# Altium PCB ECE315.PcbDoc (part 1 of 2)
Units mm, origin at the board's own origin, x right, y up, seen from the top; angles counter-clockwise.
Board outline 100.25 x 100.25 mm, 2 copper layers (Top Layer, Bottom Layer); 67 components, 52 nets, 224 pads, 194 vias.
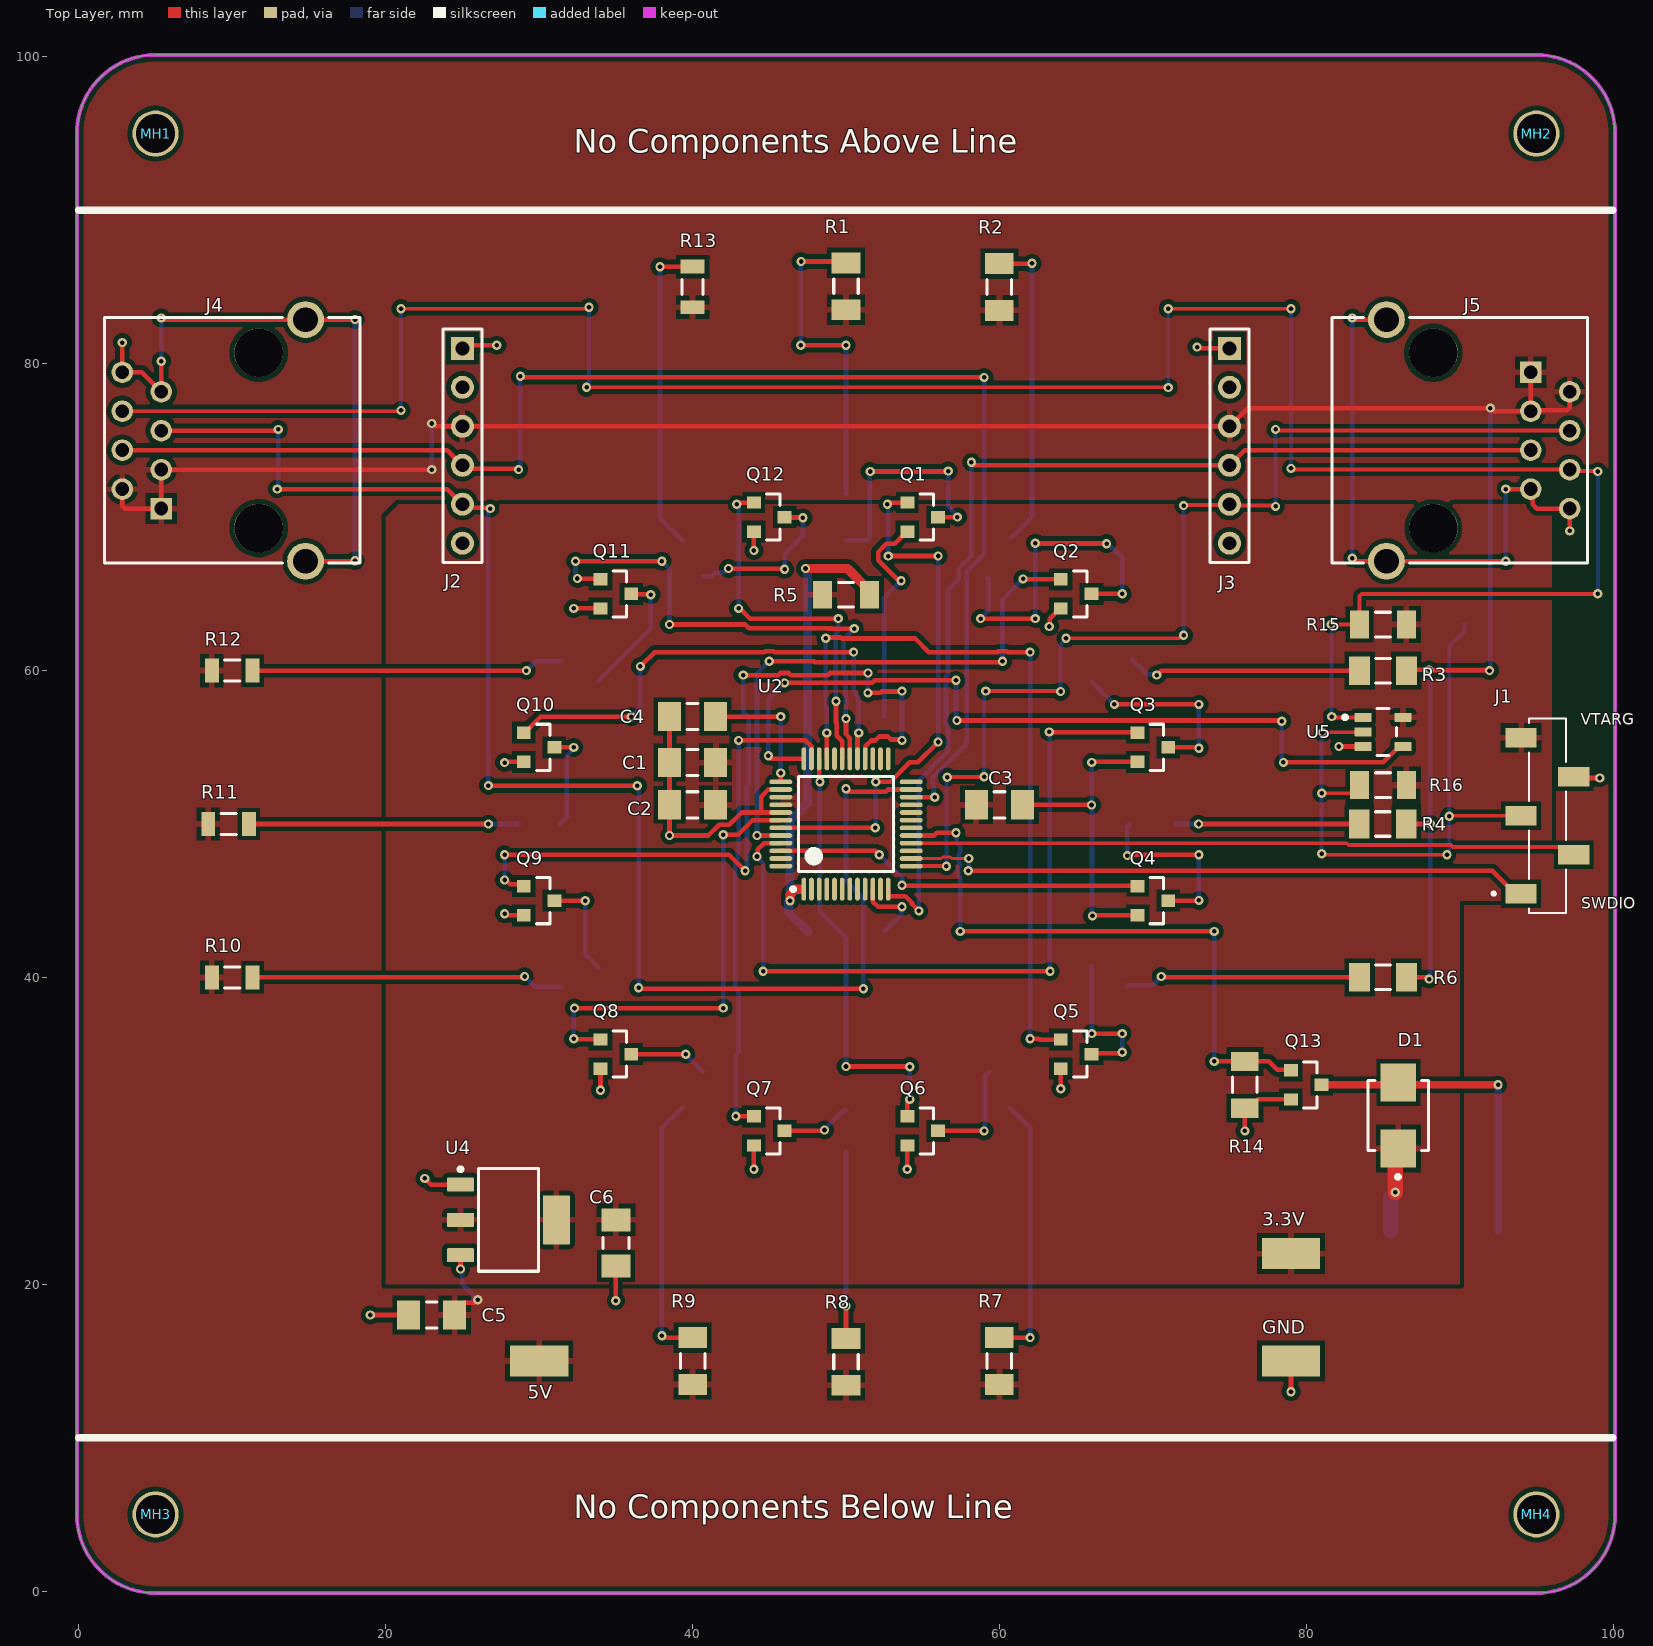
[diagram p0: Top Layer view]
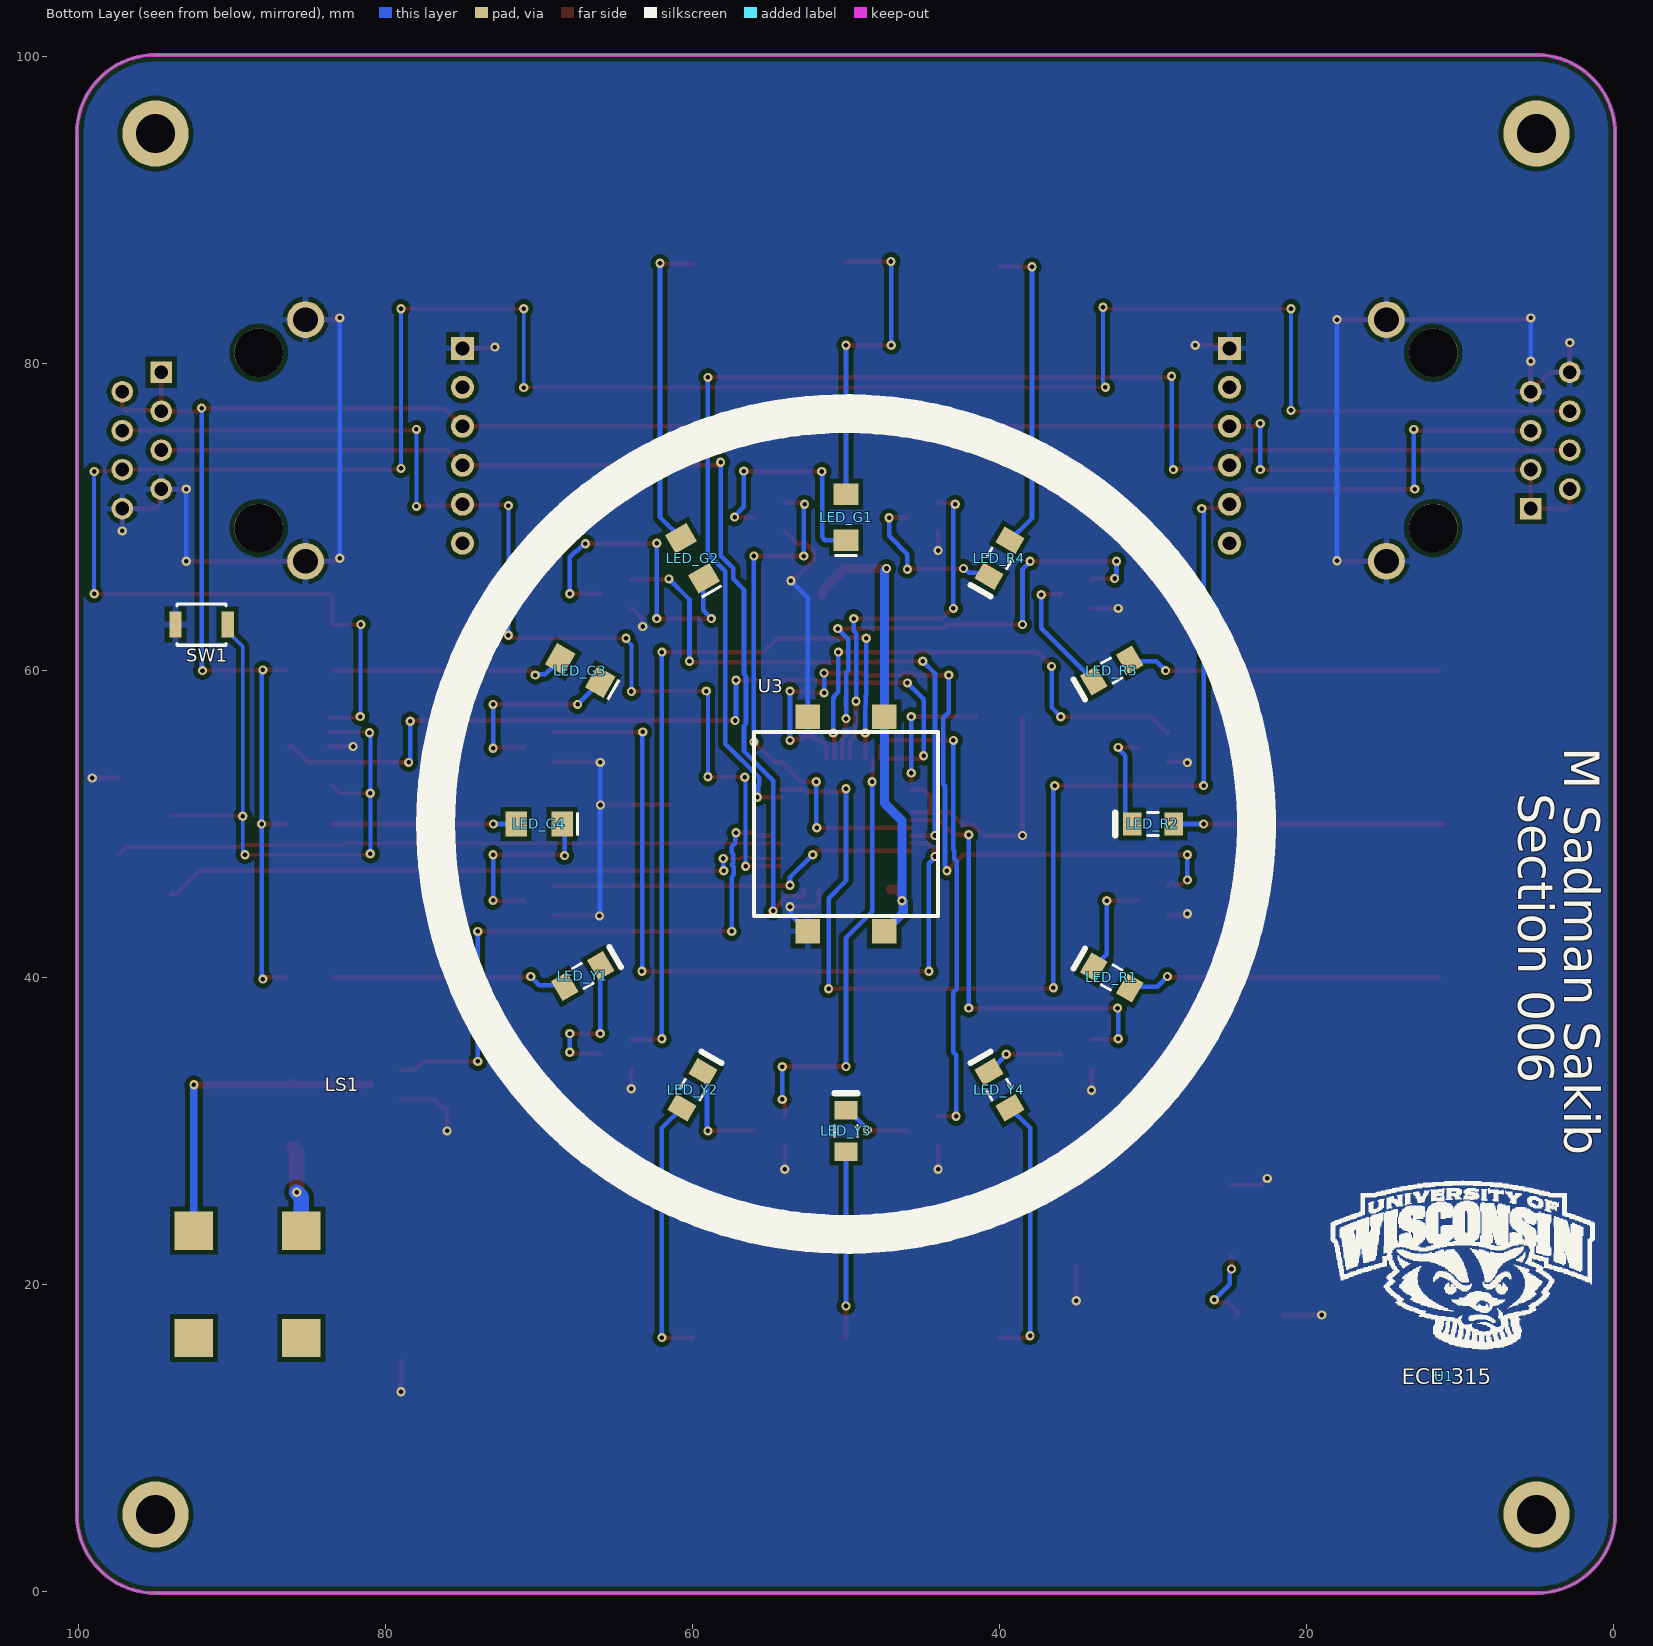
[diagram p1: Bottom Layer view, seen from below]
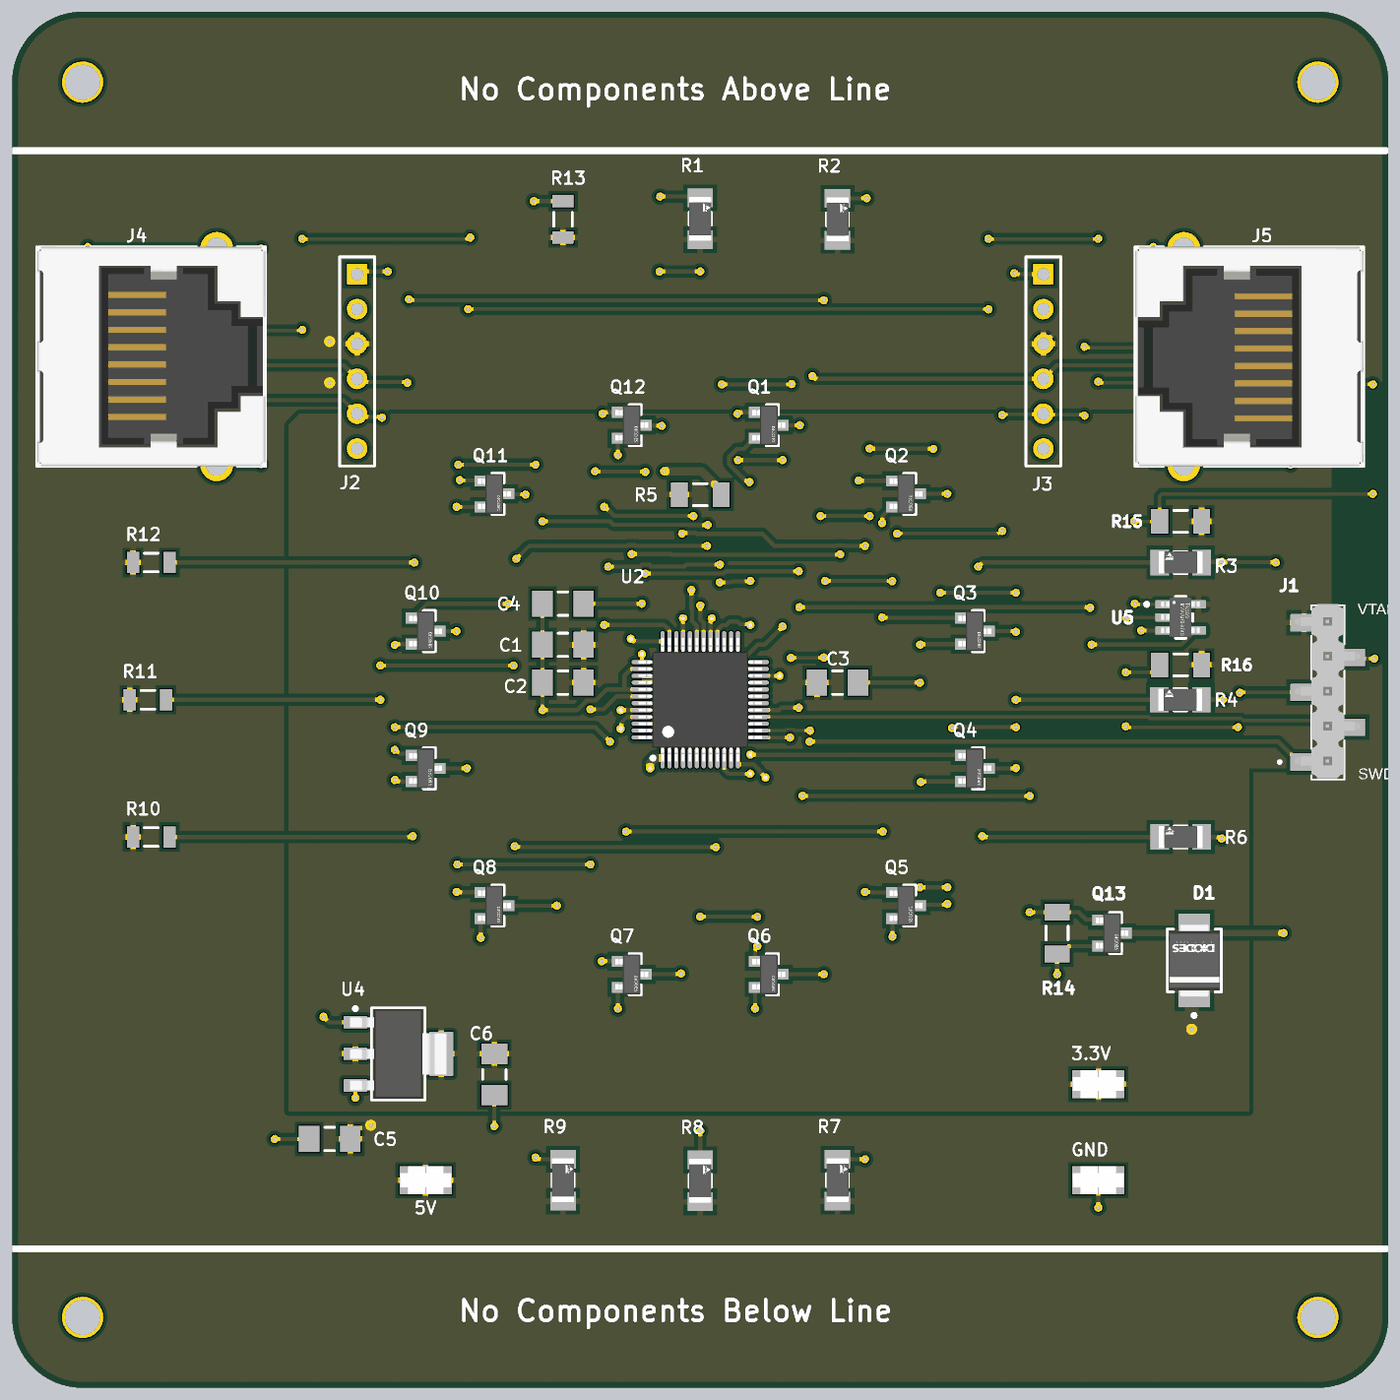
[diagram p2: 3D render of the assembled board from above, using the file's embedded part models]

## Layer stack, top to bottom
Top Solder: solder mask 0.0102, Solder Resist, Dk 3.5
Top Layer: signal copper 0.0356
Dielectric1: dielectric 0.32, FR-4, Dk 4.8
Bottom Layer: signal copper 0.0356
Bottom Solder: solder mask 0.0102, Solder Resist, Dk 3.5

## Board outline
-0.127,4.999 ccw(c5,5) 5,-0.127 95,-0.127 ccw(c95,5) 100.127,5 100.127,95 ccw(c95,95) 95.001,100.127 95,100.127 5,100.127 4.999,100.127 ccw(c5,95) -0.119,95.296 -0.127,95.25

## Design rules (kind name [scope] priority, off if disabled: settings)
Clearance Polygon_Clearance [All vs InPolygon] p1: gap=0.3 ignorepadtopadclearanceinfootprint=FALSE
Clearance [All] p2: gap=0.2 ignorepadtopadclearanceinfootprint=TRUE
ComponentClearance [InComponent('U3')] p1: gap=0 collisioncheckmode=3 verticalgap=0.254 showdistances=FALSE
Height [All] p1: minheight=0 maxheight=75 prefheight=12.7
HoleSize [All] p1: absolutevalues=TRUE maxlimit=6.35 minlimit=0.3 maxpercent=80.000 minpercent=20.000
MinimumAnnularRing [All] p1: minimumring=0.15
MinimumSolderMaskSliver [All] p1: minsoldermaskwidth=0.22
NetAntennae NetAntennae_5.0V [InNet('5.0V')] p1: netantennaetolerance=0
NetAntennae NetAntennae_3.3V [InNet('3.3V')] p2: netantennaetolerance=0
PlaneClearance [All] p1: clearance=0.3
PlaneConnect [All] p1: planeconnectstyle=Relief reliefexpansion=0.3 reliefentries=4 reliefconductorwidth=0.3 reliefairgap=0.3
PolygonConnect ViaConnect [All vs IsVia] p1: connectstyle=Direct reliefconductorwidth=0.381 reliefentries=4 polygonreliefangle="90 Angle" airgapwidth=0.254
PolygonConnect [All] p2: connectstyle=Relief reliefconductorwidth=0.4 reliefentries=4 polygonreliefangle="90 Angle" airgapwidth=0.3
RoutingVias [All] p1: holewidth=0.3 width=0.6 viastyle="Through Hole" minholewidth=0.3 minwidth=0.6 maxholewidth=5 maxwidth=10
SilkToSilkClearance [All] p1: silktosilkclearance=0
SilkToSolderMaskClearance [IsPad] p1: minsilkscreentomaskgap=0 clearancetoexposedcopper=TRUE
SolderMaskExpansion [All] p1: expansion=0.102 istentingtop=FALSE
UnConnectedPin [All] p1:
Width [All] p1: maxlimit=10 minlimit=0.2 preferedwidth=0.6
21 further rules are at their usual default settings.

## Components (designator, comment, footprint, x,y, rotation, side; value= is the part's Value field where it differs from the comment)
3.3V "5019" KSTN-5019_V 79,22 r180 top (schematic designator TP2)
5V "5019" KSTN-5019_V 30,15 r180 top (schematic designator TP1)
C1 "C1206C105K3RACTU" CAPC3216X180X50ML20T25 40,54 r0 top
C2 "C1206C105K3RACTU" CAPC3216X180X50ML20T25 40,51.25 r0 top
C3 "C1206C105K3RACTU" CAPC3216X180X50ML20T25 60,51.25 r180 top
C4 "C1206C105K3RACTU" CAPC3216X180X50ML20T25 40,57 r0 top
C5 "C1206C105K3RACTU" CAPC3216X180X50ML20T25 23,18 r0 top
C6 "C1206C105K3RACTU" CAPC3216X180X50ML20T25 35,22.7 r90 top
D1 "B340LB-13-F" FP-SMB-MFG 86,31 r90 top value=180pF
GND "5019" KSTN-5019_V 79,15 r180 top (schematic designator TP3)
J1 "10129380-905002BLF" AMPHENOL_10129380-905002BLF 95.715,50.54 r90 top
J2 "" HDR1X6 25,81 r270 top locked
J3 "" HDR1X6 75,81 r270 top locked
J4 "615008138221" 615008138221 10,75 r90 top locked
J5 "615008138221" 615008138221 90,75 r270 top locked
LED_G1 "150120GS75000" WL-SMCW_1206_150120xx75000 50,70 r90 bottom locked
LED_G2 "150120GS75000" WL-SMCW_1206_150120xx75000 60,67.321 r60 bottom locked
LED_G3 "150120GS75000" WL-SMCW_1206_150120xx75000 67.321,60 r30 bottom locked
LED_G4 "150120GS75000" WL-SMCW_1206_150120xx75000 70,50 r0 bottom locked
LED_R1 "SML-LX1206IC-TR" LUMX-SML-LX1206IC_V 32.679,40 r30 bottom locked
LED_R2 "SML-LX1206IC-TR" LUMX-SML-LX1206IC_V 30,50 r0 bottom locked
LED_R3 "SML-LX1206IC-TR" LUMX-SML-LX1206IC_V 32.679,60 r330 bottom locked
LED_R4 "SML-LX1206IC-TR" LUMX-SML-LX1206IC_V 40,67.321 r300 bottom locked
LED_Y1 "SML-LX1206YC-TR" LUMX-SML-LX1206YC-TR_V 67.158,40.094 r150 bottom locked
LED_Y2 "SML-LX1206YC-TR" LUMX-SML-LX1206YC-TR_V 60,32.679 r120 bottom locked
LED_Y3 "SML-LX1206YC-TR" LUMX-SML-LX1206YC-TR_V 50,30 r90 bottom locked
LED_Y4 "SML-LX1206YC-TR" LUMX-SML-LX1206YC-TR_V 40,32.679 r60 bottom locked
LS1 "CMT-8540S-SMT" CUI_CMT-8540S-SMT 89,20 r90 bottom
MH1 "MHOLE_2_55MM" MHOLE_2_55MM#1 10,90 r0 top locked
MH2 "MHOLE_2_55MM" MHOLE_2_55MM#2 90,90 r0 top locked
MH3 "MHOLE_2_55MM" MHOLE_2_55MM#3 10,10 r0 top locked
MH4 "MHOLE_2_55MM" MHOLE_2_55MM#4 90,10 r0 top locked
Q1 "2N7002-7-F" FP-SOT23-MFG 55,70 r0 top
Q2 "2N7002-7-F" FP-SOT23-MFG 65,65 r0 top
Q3 "2N7002-7-F" FP-SOT23-MFG 70,55 r0 top
Q4 "2N7002-7-F" FP-SOT23-MFG 70,45 r0 top
Q5 "2N7002-7-F" FP-SOT23-MFG 65,35 r0 top
Q6 "2N7002-7-F" FP-SOT23-MFG 55,30 r0 top
Q7 "2N7002-7-F" FP-SOT23-MFG 45,30 r0 top
Q8 "2N7002-7-F" FP-SOT23-MFG 35,35 r0 top
Q9 "2N7002-7-F" FP-SOT23-MFG 30,45 r0 top
Q10 "2N7002-7-F" FP-SOT23-MFG 30,55 r0 top
Q11 "2N7002-7-F" FP-SOT23-MFG 35,65 r0 top
Q12 "2N7002-7-F" FP-SOT23-MFG 45,70 r0 top
Q13 "2N7002-7-F" FP-SOT23-MFG 80,33 r0 top
R1 "CRCW1206330RFKEA" FP-CRCW1206-e3-IPC_A 50,85.045 r90 top
R2 "CRCW1206330RFKEA" FP-CRCW1206-e3-IPC_A 60,85 r90 top
R3 "CRCW1206330RFKEA" FP-CRCW1206-e3-IPC_A 85,60 r180 top
R4 "CRCW1206330RFKEA" FP-CRCW1206-e3-IPC_A 84.982,50 r180 top
R5 "RC1206FR-0710KL" RESC3116X65X40ML10T20 50,64.944 r180 top
R6 "CRCW1206330RFKEA" FP-CRCW1206-e3-IPC_A 85,40 r180 top
R7 "CRCW1206330RFKEA" FP-CRCW1206-e3-IPC_A 60,15 r90 top
R8 "CRCW1206330RFKEA" FP-CRCW1206-e3-IPC_A 50,14.95 r90 top
R9 "CRCW1206330RFKEA" FP-CRCW1206-e3-IPC_A 40,15 r90 top
R10 "560Ω" RESC3216X70X50LL05T20 10,40 r0 top
R11 "560Ω" RESC3216X70X50LL05T20 9.759,50 r0 top
R12 "560Ω" RESC3216X70X50LL05T20 10,60 r0 top
R13 "560Ω" RESC3216X70X50LL05T20 40,85 r90 top
R14 "RC1206FR-0710KL" RESC3116X65X40ML10T20 76,33 r90 top
R15 "RC1206FR-0710KL" RESC3116X65X40ML10T20 85,63 r0 top
R16 "RC1206FR-0710KL" RESC3116X65X40ML10T20 85,52.54 r0 top
SW1 "B3U-1000P" FP-B3U-1000P-MFG 92,63 r180 bottom
U1 "Bucky" WalkingBucky 11,14 r180 bottom
U2 "CY8C4045AZI-S413" TQFP48_7X7 50,50 r90 top
U3 "TL3300DF160Q" TL3300DF160Q 50,50 r90 bottom
U4 "TLV1117LV33DCYR" DCY0004A_N 28,24.2 r0 top
U5 "SN74AHC1G08DBVR" FP-DBV0005A-MFG 85,56 r0 top

## Footprints (in the part's own frame and the unit in brackets; to place one, negate y for a bottom-side part, rotate by r counter-clockwise, add the part's x,y. Pads: shape width x height; smd on the part's side, far side on the other; paste and mask are expansions set on the pad)
615008138221 [mm] "Modular Jack Vertical Shielded 8P8C Front Post"
  rect 1.4x1.4 hole 0.9: 1(-4.445,4.625)
  round 1.4 hole 0.9: 2(-3.175,7.165) 3(-1.905,4.625) 4(-0.635,7.165) 5(0.635,4.625) 6(1.905,7.165) 7(3.175,4.625) 8(4.445,7.165)
  round 3.17 hole 3.17 unplated: MH1(-5.715,-1.725) MH2(5.715,-1.725)
  round 2.4 hole 1.6: S1(-7.875,-4.775) S2(7.875,-4.775)
  silkscreen extent -8,-8.33 8,8.32, body extent -8,-8.32 8,8.33, height 16.62
AMPHENOL_10129380-905002BLF [mm]
  rect 1.27x2.03 smd mask+0.05: 1(-5.08,1.715) 2(-2.54,-1.715) 3(0,1.715) 4(2.54,-1.715) 5(5.08,1.715)
  silkscreen extent -6.35,-1.22 6.35,3.6, body extent -6.27,-2.38 6.43,2.41, height 12.07
CAPC3216X180X50ML20T25 [mm] "Chip Capacitor, 2-Leads, Body 3.40x1.80mm, IPC Low Density"
  rect 1.5x1.9 smd: 1(-1.5,0) 2(1.5,0)
  silkscreen extent -0.35,-0.85 0.35,0.85, body extent -1.7,-0.9 1.7,0.9, height 1.8
CUI_CMT-8540S-SMT [mm]
  rect 2.5x2.5 smd: M1(-3.5,-3.5) M2(-3.5,3.5) N(3.5,3.5) P(3.5,-3.5)
DCY0004A_N [mm] "SOT223, 4-Leads, Body 6.7x3.7mm, Pitch 2.3mm, IPC Medium Density"
  rrect11% 1.75x0.9 smd: 1(-3.125,2.3) 2(-3.125,0) 3(-3.125,-2.3)
  rrect6% 1.75x3.2 smd: 4(3.125,0)
  silkscreen extent -3.25,-3.35 1.95,3.42, body extent -3.5,-3.25 3.5,3.25, height 1.62
FP-B3U-1000P-MFG [mm]
  rect 0.8x1.7 smd paste+0 mask+0: 1(-1.7,0) 2(1.7,0)
  silkscreen extent -1.6,-1.35 1.6,1.35, body extent -2,-1.26 2,1.24, height 1.6
FP-CRCW1206-e3-IPC_A [mm]
  rect 1.356x1.858 smd paste+0 mask+0: 1(-1.526,0) 2(1.526,0)
  silkscreen extent -0.47,-0.8 0.47,0.8, body extent -2.7,-1.43 2.7,1.43, height 0.25
FP-DBV0005A-MFG [mm]
  rrect17% 1.1x0.6 smd paste+0 mask+0: 1(-1.3,0.95) 2(-1.3,0) 3(-1.3,-0.95) 4(1.3,-0.95) 5(1.3,0.95)
  silkscreen extent -2.6,-1.53 0.87,1.52, body extent -1.95,-1.78 1.95,1.78, height 0.25
FP-SMB-MFG [mm]
  rect 2.5x2.3 smd paste+0 mask+0: 1(-2.15,0) 2(2.15,0)
  silkscreen extent -4.12,-1.97 2.28,1.97, body extent -3.5,-2.07 3.5,2.07, height 0.25
FP-SOT23-MFG [mm]
  rect 0.9x0.8 smd paste+0 mask+0: 1(-1,0.95) 2(-1,-0.95) 3(1,0)
  silkscreen extent -0.18,-1.5 0.7,1.5, body extent -1.55,-1.6 1.55,1.6, height 0.25
HDR1X6 [mm] "Connector; Header; 6 Position"
  rect 1.5x1.5 hole 0.9: 1(0,0)
  round 1.5 hole 0.9: 2(2.54,0) 3(5.08,0) 4(7.62,0) 5(10.16,0) 6(12.7,0)
  silkscreen extent -1.27,-1.27 13.97,1.27
KSTN-5019_V [mm] "Test Point, 1-Leads, Body 3.81x2.03mm"
  rect 3.8x2.03 smd: 1(0,0)
  body extent -1.9,-1.01 1.9,1.02, height 2.29
LUMX-SML-LX1206IC_V [mm] "SMD, 2-Leads, Body 3.2x1.5mm"
  rect 1.2x1.5 smd: 1(-1.35,0) 2(1.35,0)
  silkscreen extent -0.35,-0.75 2.45,0.75, body extent -1.6,-0.8 1.6,0.8, height 1.1
LUMX-SML-LX1206YC-TR_V [mm] "SMD, 2-Leads, Body 3.2x1.5mm"
  rect 1.2x1.5 smd: 1(-1.35,0) 2(1.35,0)
  silkscreen extent -0.35,-0.75 2.45,0.75, body extent -1.6,-0.75 1.6,0.75, height 1.25
MHOLE_2_55MM#1 [mm]
  round 3 / inner round 4.572 / far side round 4.318 hole 2.55: 1(-5,5)
MHOLE_2_55MM#2 [mm]
  round 3 / inner round 4.572 / far side round 4.318 hole 2.55: 1(5,5)
MHOLE_2_55MM#3 [mm]
  round 3 / inner round 4.572 / far side round 4.318 hole 2.55: 1(-5,-5)
MHOLE_2_55MM#4 [mm]
  round 3 / inner round 4.572 / far side round 4.318 hole 2.55: 1(5,-5)
RESC3116X65X40ML10T20 [mm] "Chip Resistor, 2-Leads, Body 3.10x1.60mm, IPC Low Density"
  rect 1.25x1.8 smd: 1(-1.525,0) 2(1.525,0)
  silkscreen extent -0.5,-0.8 0.5,0.8, body extent -1.6,-0.85 1.6,0.85, height 0.65
RESC3216X70X50LL05T20 [mm] "Chip Resistor, 2-Leads, Body 3.20x1.60mm, IPC High Density"
  rect 0.9x1.55 smd: 1(-1.325,0) 2(1.325,0)
  silkscreen extent -0.5,-0.67 0.5,0.67, body extent -1.63,-0.82 1.62,0.82, height 0.7
TL3300DF160Q [mm] "SWITCH TACTILE SPST-NO 0.05A 12V"
  rect 1.6x1.6 smd: 1(-7,2.5) 2(7,2.5) 3(-7,-2.5) 4(7,-2.5)
  silkscreen extent -6,-6 6,6, body extent -7.51,-6.03 7.49,5.97, height 4.3
TQFP48_7X7 [mm] "TSQFP, 48-Leads, Body 7.00x7.00mm, Pitch 0.50mm, IPC Medium Density"
  oval 1.5x0.3 smd: 1(-4.25,2.75) 2(-4.25,2.25) 3(-4.25,1.75) 4(-4.25,1.25) 5(-4.25,0.75) 6(-4.25,0.25) 7(-4.25,-0.25) 8(-4.25,-0.75) 9(-4.25,-1.25) 10(-4.25,-1.75) 11(-4.25,-2.25) 12(-4.25,-2.75) 25(4.25,-2.75) 26(4.25,-2.25) 27(4.25,-1.75) 28(4.25,-1.25) 29(4.25,-0.75) 30(4.25,-0.25) 31(4.25,0.25) 32(4.25,0.75) 33(4.25,1.25) 34(4.25,1.75) 35(4.25,2.25) 36(4.25,2.75)
  oval 0.3x1.5 smd: 13(-2.75,-4.25) 14(-2.25,-4.25) 15(-1.75,-4.25) 16(-1.25,-4.25) 17(-0.75,-4.25) 18(-0.25,-4.25) 19(0.25,-4.25) 20(0.75,-4.25) 21(1.25,-4.25) 22(1.75,-4.25) 23(2.25,-4.25) 24(2.75,-4.25) 37(2.75,4.25) 38(2.25,4.25) 39(1.75,4.25) 40(1.25,4.25) 41(0.75,4.25) 42(0.25,4.25) 43(-0.25,4.25) 44(-0.75,4.25) 45(-1.25,4.25) 46(-1.75,4.25) 47(-2.25,4.25) 48(-2.75,4.25)
  silkscreen extent -4.37,-3.1 3.1,3.57, body extent -4.5,-4.5 4.5,4.5, height 1.4
WalkingBucky [mm]
  silkscreen extent -7.42,1.75 9.8,12.73
WL-SMCW_1206_150120xx75000 [mm] "SMD Mono-color Chip LED, body 3.2x1.6mm"
  rect 1.4x1.6 smd: 1(-1.5,0) 2(1.5,0)
  silkscreen extent -2.6,-0.75 -2.4,0.75, body extent -1.6,-0.8 1.6,0.8, height 0.68

## Part data
3.3V 5V GND: library part CMP-1672-00008-1, "Test Point, 1 Position SMD, RoHS, Tape and Reel", Package Quantity=1000, ComponentLink1Description="Manufacturer URL", ComponentLink1URL=http://www.keyelco.com/, ComponentLink2Description=Datasheet, ComponentLink2URL=http://www.keyelco.com/product-pdf.cfm?p=1357, Contact Plating=Silver, DatasheetVersion=03/2014, Mount="Surface Mount", Mounting Technology="Surface Mount", PackageDescription="1-Pin Surface Mount Device, Body 3.81 x 2.03 mm", PackageReference=5019, Packaging="Tape and Reel", Pins=1, RoHSCompliant=True
C1 C2 C3 C4 C5 C6: library part CMP-2000-04991-1, "Chip Capacitor, 1 uF, +/- 10%, 25 V, -55 to 125 degC, 1206 (3216 Metric), RoHS, Tape and Reel", Capacitance=1uF, Capacitance - nF=1000nF, Case Code - in=1206, Case Code - mm=3216, Case Height=1.6mm, Case Length=3.2mm, Dielectric=X7R, Manufacturer=Kemet, Maximum Operating Temperature=+125C, Minimum Operating Temperature=-55C, Operating Temperature Range=-55Cto+125C, Package / Case=1206(3216metric), Package Description="2-Pin Surface Mount Device, Body 3.2 x 1.6 mm", Temperature Coefficient / Code=+/-15%, Tolerance=10%, Voltage Rating=25V, Brand=Kemet, Case Width=1.6mm, Class=Class1, Datasheet URL=https://ciiva.com/datasheet-click-18194173?src=ciiva&sig=6daff8c4, Datasheet Version=Jul-14, Dimensions=1.6mmWx3.2mmLx1.6mmH, Factory Pack Quantity=2000, Manufacturer URL=http://www.kemet.com/, Package Reference=1206, Packaging=Reel, Product=GeneralTypeMLCCs, Product Category=MultilayerCeramicCapacitorsMLCC-SMD/SMT, RoHS=Details, Series=C1206C, Termination Style=SMD/SMT, Type=SMDMLCCX7R6.3-250VDCCommericalGrade, Voltage Rating DC=25V
D1: library part CMP-12790-000022-1, "DIODE SCHOTTKY 40V 3A SMB", Average Rectified Current=3A, Capacitance=180pF, Case/Package=SMB, Forward Voltage=450mV, Manufacturer="Diodes Inc.", Max Forward Surge Current (Ifsm)=70A, Max Junction Temp=+150°C, Max Operating Temperature=125°C, Max Repetitive Reverse Voltage=40V, Max Reverse Current=2mA, Min Operating Temperature=-55°C, Package Quantity=3000, Supplier Part Number 1=B340LB-FDICT-ND, Temperature="-55°C to +150°C", Automotive=No, Category=Diode, ComponentLink1Description=https://datasheet.ciiva.com/4715/ds30240-71143-4715794.pdf?src-supplier=Mouser, ComponentLink1URL=https://datasheet.ciiva.com/4715/ds30240-71143-4715794.pdf?src-supplier=Mouser, ComponentLink2Description=Datasheet, ComponentLink2URL=https://www.diodes.com/assets/Datasheets/ds30240.pdf, ComponentLink3Description=https://datasheet.ciiva.com/26949/getdatasheetpartid-146318-26949355.pdf?src-supplier=Verical, ComponentLink3URL=https://datasheet.ciiva.com/26949/getdatasheetpartid-146318-26949355.pdf?src-supplier=Verical, ComponentLink4Description=https://datasheet.ciiva.com/1177/ds30240-1177479.pdf?src-supplier=Element14, ComponentLink4URL=https://datasheet.ciiva.com/1177/ds30240-1177479.pdf?src-supplier=Element14, ComponentLink5Description=https://datasheet.ciiva.com/16380/ds30240-16380877.pdf?src-supplier=Future+Electronics, ComponentLink5URL=https://datasheet.ciiva.com/16380/ds30240-16380877.pdf?src-supplier=Future+Electronics, ComponentLink6Description=https://datasheet.ciiva.com/8303/ds30240-8303077.pdf?src-supplier=Avnet, ComponentLink6URL=https://datasheet.ciiva.com/8303/ds30240-8303077.pdf?src-supplier=Avnet, ComponentLink7Description=https://datasheet.ciiva.com/914/ds30240-914107.pdf?src-supplier=Digi-Key, ComponentLink7URL=https://datasheet.ciiva.com/914/ds30240-914107.pdf?src-supplier=Digi-Key, ComponentLink8Description=https://datasheet.ciiva.com/914/ds30240-914108.pdf?src-supplier=Digi-Key, ComponentLink8URL=https://datasheet.ciiva.com/914/ds30240-914108.pdf?src-supplier=Digi-Key, ComponentLink9Description=https://datasheet.ciiva.com/914/ds30240-914106.pdf?src-supplier=Digi-Key, ComponentLink9URL=https://datasheet.ciiva.com/914/ds30240-914106.pdf?src-supplier=Digi-Key, Current=3A, Current Rating=3A, Device Class L1="Discrete Semiconductors", Device Class L2=Diodes, Device Class L3="Schottky Diodes", Digikey Description="DIODE SCHOTTKY 40V 3A SMB", Element Configuration=Single, Footprint Url=https://www.diodes.com/assets/Package-Files/SMB.pdf, Forward Current=3A, Height=2.5mm, Lead Free=Yes, Length=4.57mm, Manufacturer Part Number=B340LB-13-F, Max Repetitive Reverse Voltage (Vrrm)=40V, Max Reverse Voltage (DC)=40V, Max Surge Forward Current=70A, Mount="Surface Mount", Mouser Description="Schottky Diodes & Rectifiers 40V 3A", Number of Pins=2, Octopart=https://octopart.com/b340lb-13-f-diodes+inc.-325823, Output Current=3A, Package=SMB, Packaging="Tape and Reel", Peak Non-Repetitive Surge Current=70A, Peak Reverse Current=2mA, Polarity=Standard, Pricing 1="1=0.43000, 10=0.36500, 100=0.27250, 500=0.21414, 1000=0.16547 (USD)", Radiation Hardening=No, Reach SVHC Compliant=Yes, Reverse Voltage=40V, RoHS=TRUE, RoHS Compliant=Yes, Series=-, Standoff Height=0.05mm, Stock 1=168517, Supplier 1=Digi-Key, Supplier 2=Newark, Supplier Part Number 2=12T1468, Temperature Range High=+150°C, Temperature Range Low=-55°C, Termination=SMD/SMT, Voltage=40V, Voltage Rating (DC)=40V, Weight=0.00328oz, Width=3.94mm
J1: "Conn Unshrouded Header HDR 5 POS 2.54mm Solder ST SMD Poly Bag", Manufacturer 1=ICC, Package=None, Supplier Part Number 1=10129380-905002BLF-ND, Availability="In Stock", Check_prices=https://www.snapeda.com/parts/10129380-905002BLF/Amphenol/view-part/?ref=eda, Manufacturer Part Number 1=10129380-905002BLF, MF="AMPHENOL ICC / FCI", MP=10129380-905002BLF, Price=None, Purchase-URL=https://pricing.snapeda.com/search/part/10129380-905002BLF/?ref=eda, RoHS=No, SnapEDA_Link=https://www.snapeda.com/parts/10129380-905002BLF/Amphenol/view-part/?ref=snap, Supplier 1=Digi-Key
J2 J3: library part CONN_HEADER_MALE_1x6, "Female, 6C, Rt Angle, .100\"CC; 3.15mm Tail, No Mounting; PBT, Phos. Bronze, 105 C", Color=Black, Flammability Rating="UL94 V-0", Manufacturer 1=Sullins, Manufacturer Part Number 1=PPPC061LGBN-RC, Max Operating Temperature=105°C, Min Operating Temperature=-40°C, Package Quantity=1000, Supplier Part Number 1=S5481-ND, Voltage Rating=250V, Category=Connectors, ComponentLink1Description=https://media.digikey.com/pdf/Data%20Sheets/Sullins%20PDFs/Female_Headers.100_DS.pdf?src-supplier=Digi-Key, ComponentLink1URL=https://media.digikey.com/pdf/Data%20Sheets/Sullins%20PDFs/Female_Headers.100_DS.pdf?src-supplier=Digi-Key, ComponentLink2Description=http://www.sullinscorp.com/catalogs/78_Page80-81_HEADER_.100_2.54mm_FEMALE.pdf?src-supplier=Future+Electronics, ComponentLink2URL=http://www.sullinscorp.com/catalogs/78_Page80-81_HEADER_.100_2.54mm_FEMALE.pdf?src-supplier=Future+Electronics, Connector Type=Header, Contact Finish - Mating=GOLD, Contact Material=Bronze, Contact Plating=Gold, Contact Shape=Square, Contact Type="Female Socket", Fastening Type=Pull, Height=2.4mm, Housing Color=Black, Housing Material=Plastic, Insulation Color=Black, Insulation Material=Polyester, Lead Free="Lead Free", Length=15.7mm, Mount="Through Hole", Number of Positions=6, Number of Rows=1, Packaging=Bulk, Pitch=0.1inch, Pricing 1="1=0.66, 10=0.56, 80=0.50288, 440=0.41148, 1000=0.36576, 5000=0.3302 (USD)", RoHS=Yes, RoHS Compliant=Yes, Series=-, Stock 1=12284, Supplier 1=Digi-Key, Termination=Solder, Width=8.5mm
J4 J5: library part CMP-1502-01731-1, "Modular Jack WR-MJ, Front Post, Shielded, Vertical Entry, THT, 8P8C", Contact Resistance=20mOhm, Manufacturer="Wurth Elektronik", Operating Temperature=-40to85degC, Rated Current=1.5A, Withstanding Voltage=1000VAC, Working Voltage=120VAC, Compliance=Leadfree/RoHS, Datasheet URL=https://katalog.we-online.com/em/datasheet/615008138221.pdf, Entrance=Vertical, Manufacturer URL=http://www.we-online.de, Mounting Technology=THT, Package Reference=615008138221, Packaging=Tray, Part Number=615008138221, Pin Number=8P8C, Port=1x1, Publisher=WurthElektronik
LED_G1 LED_G2 LED_G3 LED_G4: library part CMP-1426-00014-3, Case Code (Imperial)=1206, Case Code (Metric)=3216, Color=Green, Forward Current=100mA, Forward Voltage=3.2V, Lens Color=Colorless, Manufacturer="Wurth Electronics", Max Junction Temperature (Tj)=95°C, Max Operating Temperature=85°C, Max Reverse Voltage (DC)=5V, Min Operating Temperature=-40°C, Package Quantity=1, Power Dissipation=105mW, Supplier Part Number=732-4990-1-ND, Test Current=20mA, Case/Package=1206, Category=LEDs, ComponentLink1Description=https://datasheet.ciiva.com/22656/150120gs75000-22656979.pdf?src-supplier=Element14, ComponentLink1URL=https://datasheet.ciiva.com/22656/150120gs75000-22656979.pdf?src-supplier=Element14, ComponentLink2Description=https://datasheet.ciiva.com/29279/759441-da-01-en-chipled-1206-w-kl-gruen-150120gs75000-29279042.pdf?src-supplier=Conrad, ComponentLink2URL=https://datasheet.ciiva.com/29279/759441-da-01-en-chipled-1206-w-kl-gruen-150120gs75000-29279042.pdf?src-supplier=Conrad, ComponentLink3Description=https://datasheet.ciiva.com/29561/150120gs75000-29561883.pdf?src-supplier=Digi-Key, ComponentLink3URL=https://datasheet.ciiva.com/29561/150120gs75000-29561883.pdf?src-supplier=Digi-Key, ComponentLink4Description=https://datasheet.ciiva.com/29561/150120gs75000-29561884.pdf?src-supplier=Digi-Key, ComponentLink4URL=https://datasheet.ciiva.com/29561/150120gs75000-29561884.pdf?src-supplier=Digi-Key, ComponentLink5Description=https://datasheet.ciiva.com/29561/150120gs75000-29561885.pdf?src-supplier=Digi-Key, ComponentLink5URL=https://datasheet.ciiva.com/29561/150120gs75000-29561885.pdf?src-supplier=Digi-Key, ComponentLink6Description=https://datasheet.ciiva.com/48430/150120gs75000-eng-tds-48430053.pdf?src-supplier=Distrelec, ComponentLink6URL=https://datasheet.ciiva.com/48430/150120gs75000-eng-tds-48430053.pdf?src-supplier=Distrelec, Dominant Wavelength=525nm, Height=680µm, Length=3.2mm, Lens Size=1.6mm, Lens Style="Clear, Rectangular", Lens Transparency=Clear, Luminous Intensity=450mcd, Manufacturer Part Number=150120GS75000, Mount="Surface Mount", Mounting Technology="Surface Mount", NexarPartId=29717787, Packaging="Tape and Reel", Peak Wavelength=515nm, Pricing="1=0.23, 50=0.211, 100=0.182, 500=0.158 (USD)", REACH SVHC=Unknown, Reach SVHC Compliant=Unknown, Reverse Voltage=5V, RoHS=Compliant, RoHS Compliant=Yes, Series=WL-SMCW, Stock=46051, Supplier=Digi-Key, Viewing Angle=140°, Wavelength=520nm, Width=1.6mm
LED_R1 LED_R2 LED_R3 LED_R4: library part CMP-2000-07123-1, "LED Red, 65 mW, -40 to 85 degC, 2-Pin SMD, RoHS, Tape and Reel", Case Code (Imperial)=1206, Case Code (Metric)=3216, Color=Red, Current Rating=25mA, Forward Current=100mA, Forward Voltage=2.6V, Lens Color=Colorless,Clear, Manufacturer=Lumex, Manufacturer Part Number 1=SMLLX1206ICTR, Max Operating Temperature=85°C, Min Operating Temperature=-40°C, Operating Temperature=-25to85C, Package Description="2-Pin Surface Mount Device, Body 3.2 x 1.5 mm", Package Quantity=3000, Package Reference=SML-LX1206IC, Power Rating=65mW, Reverse Voltage=5(Min)V, Supplier Part Number 1=67-1356-1-ND, Supplier_Package=SMD, Test Current=20mA, Voltage Rating=2V, Approvals=UL,CSA, Case/Package=1206, Category=LEDs, ComponentLink1Description=https://datasheet.ciiva.com/12400/sml-lx1206ic-tr-112319-12400827.pdf?src-supplier=Mouser, ComponentLink1URL=https://datasheet.ciiva.com/12400/sml-lx1206ic-tr-112319-12400827.pdf?src-supplier=Mouser, ComponentLink2Description=https://datasheet.ciiva.com/16199/sml-lx1206ic-tr-16199616.pdf?src-supplier=Future+Electronics, ComponentLink2URL=https://datasheet.ciiva.com/16199/sml-lx1206ic-tr-16199616.pdf?src-supplier=Future+Electronics, ComponentLink3Description=https://datasheet.ciiva.com/2110/sml-lx1206ic-tr-2110300.pdf?src-supplier=Digi-Key, ComponentLink3URL=https://datasheet.ciiva.com/2110/sml-lx1206ic-tr-2110300.pdf?src-supplier=Digi-Key, ComponentLink4Description=https://datasheet.ciiva.com/2110/sml-lx1206ic-tr-2110301.pdf?src-supplier=Digi-Key, ComponentLink4URL=https://datasheet.ciiva.com/2110/sml-lx1206ic-tr-2110301.pdf?src-supplier=Digi-Key, ComponentLink5Description=https://datasheet.ciiva.com/2110/sml-lx1206ic-tr-2110302.pdf?src-supplier=Digi-Key, ComponentLink5URL=https://datasheet.ciiva.com/2110/sml-lx1206ic-tr-2110302.pdf?src-supplier=Digi-Key, ComponentLink6Description=https://datasheet.ciiva.com/30187/sml-lx1206ic-tr-30187578.pdf?src-supplier=Onlinecomponents.com, ComponentLink6URL=https://datasheet.ciiva.com/30187/sml-lx1206ic-tr-30187578.pdf?src-supplier=Onlinecomponents.com, ComponentLink7Description=https://datasheet.ciiva.com/8072/195796-8072871.pdf?src-supplier=Element14, ComponentLink7URL=https://datasheet.ciiva.com/8072/195796-8072871.pdf?src-supplier=Element14, ComponentLink8Description=https://datasheet.ciiva.com/8073/195796-8073097.pdf?src-supplier=Element14, ComponentLink8URL=https://datasheet.ciiva.com/8073/195796-8073097.pdf?src-supplier=Element14, ComponentLink9Description=https://datasheet.ciiva.com/15967/sml-lx1206ic-tr-15967210.pdf?src-supplier=Onlinecomponents.com, ComponentLink9URL=https://datasheet.ciiva.com/15967/sml-lx1206ic-tr-15967210.pdf?src-supplier=Onlinecomponents.com, Datasheet URL=http://www.lumex.com/content/files/ProductAttachment/SML-LX1206IC-TR.pdf, Datasheet Version="Rev. J, 08/2012", Dimension=3.2x1.6x1.1mm, Dominant Wavelength=N/A, ECCN=EAR99, Family=SML-LX1206IC, Height=1.1mm, HTS=8541402000, Illumination Color=Red, Intensity=6mcd, Lead Free="Lead Free", LED Material=GaAsP, Length=3.2mm, Lens Appearance=ColorlessNonDiffused, Lens Dimensions=2x1.6x0.5mm, Lens Size=1.5mm, Lens Style=Clear,Diffused,Colorless,Rectangular, Lens Transparency=Clear, Luminous Intensity=6mcd, Manufacturer 1=Lumex, Manufacturer URL=http://www.lumexinstruments.com/, Moisture Sensitivity Level=2, Mount="Surface Mount", Mounting=SurfaceMount, Mounting Technology=SurfaceMount, Number of LEDs=1, Number of Pins=2, Packaging=TapeandReel, Part No=SML-LX1206IC-TR, Peak Wavelength=635nm, Pin_Count=2, Pricing 1="1=0.39000, 10=0.30600, 100=0.13730, 500=0.12402, 1000=0.10187 (USD)", Reach SVHC Compliant=Yes, RoHS=Unknown, Series=-, Stock 1=113609, Supplier=Lumex, Supplier 1=Digi-Key, Supplier 2=Newark, Supplier Part Number 2=80K7325, Supplier Standard Pack=3,000, Type=Uni-Color, Viewing Angle=160, Voltage Rating (DC)=2V, Wavelength=635nm, Width=1.6mm
LED_Y1 LED_Y2 LED_Y3 LED_Y4: library part CMP-2000-07124-1, "Yellow LED, Water Clear Len, 585 nm, 2.1 V, -40 to 85 degC, 2-Pin SMD, RoHS, Tape and Reel", Case Code (Imperial)=1206, Case Code (Metric)=3216, Color=Yellow, Current - Test=20mA, Forward Voltage=2.1V, Lens Color=Colorless, Manufacturer=Lumex, Max Operating Temperature=85°C, Millicandela Rating=6mcd, Min Operating Temperature=-25°C, Package / Case=1206(3216Metric), Package Description="2-Pin Surface Mount Device, Body 3.2 x 1.5 mm", Package Quantity=3000, Power Rating=65mW, Standard Package=3,000, Supplier Part Number 1=67-1358-1-ND, Approvals=UL,CSA, Case/Package=1206, Catalog Drawings=SML-LX1206SeriesTopSML-LX1206SeriesSideSML-LX1206SeriesBottomSML-LX1206SeriesFootprint, Category=Optoelectronics, ComponentLink1Description=https://datasheet.ciiva.com/8072/269322-8072890.pdf?src-supplier=Element14, ComponentLink1URL=https://datasheet.ciiva.com/8072/269322-8072890.pdf?src-supplier=Element14, ComponentLink2Description=https://datasheet.ciiva.com/4689/sml-lx1206yc-tr-112772-4689232.pdf?src-supplier=Mouser, ComponentLink2URL=https://datasheet.ciiva.com/4689/sml-lx1206yc-tr-112772-4689232.pdf?src-supplier=Mouser, ComponentLink3Description=https://datasheet.ciiva.com/2110/sml-lx1206yc-tr-2110320.pdf?src-supplier=Digi-Key, ComponentLink3URL=https://datasheet.ciiva.com/2110/sml-lx1206yc-tr-2110320.pdf?src-supplier=Digi-Key, ComponentLink4Description=https://datasheet.ciiva.com/8073/269322-8073067.pdf?src-supplier=Element14, ComponentLink4URL=https://datasheet.ciiva.com/8073/269322-8073067.pdf?src-supplier=Element14, Datasheet URL=http://www.lumex.com/content/files/ProductAttachment/SML-LX1206YC-TR.pdf, Datasheet Version="Rev. K, 08/2012", Dominant Wavelength=568nm, Family=LEDIndication-Discrete, Features=-, Forward Current=20mA, Height=1.1mm, Height (Max)=1.10mm, Illumination Color=Yellow, Lead Free="Lead Free", Length=3.2mm, Lens Size=1.5mm, Lens Style=Flat,Rectangular,Diffused,Colorless, Lens Style/Size=RectanglewithFlatTop, Lens Transparency=Clear, Luminous Intensity=6mcd, Manufacturer 1=Lumex, Manufacturer Part Number 1=SML-LX1206YC-TR, Manufacturer URL=http://www.lumexinstruments.com/, Moisture Sensitivity Level=2, Mount="Surface Mount", Mounting Technology=SurfaceMount, Mounting Type=SurfaceMount, Number of LEDs=1, Number of Pins=2, Online Catalog=SML-LX1206RectanglewithFlatTop1206PackageLEDs, Other Names=67-1358-2LU60357TRSMLLX1206YCTR, Package Reference=SML-LX1206YC-TR, Packaging=Tape&Reel(TR), Pricing 1="1=0.41000, 10=0.26800, 100=0.17870, 500=0.12360, 1000=0.10300 (USD)", Product Training Modules=LEDsBenefitsofCustomLEDandLCDTechnology, Reach SVHC Compliant=Yes, RoHS=Yes, RoHS Compliant=Yes, RoHS Information=RoHSCertofCompliance, Series=-, Size / Dimension=3.20mmLx1.60mmW, Stock 1=74573, Supplier 1=Digi-Key, Supplier 2=Newark, Supplier Device Package=1206, Supplier Part Number 2=09J9559, Test Current=20mA, Viewing Angle=160°, Voltage - Forward (Vf) (Typ)=2.1V, Wavelength=585nm, Wavelength - Dominant=-, Wavelength - Peak=585nm, Width=1.6mm
LS1: "AUDIO MAGNETIC XDCR 1-6V SMD", Frequency=4kHz, Manufacturer 1=CUI, Manufacturer Part Number 1=CMT-8540S-SMT-TR, Max Operating Temperature=70°C, Min Operating Temperature=-20°C, Operating Supply Current=150mA, Package="CUI Inc.", Supplier Part Number 1=102-3746-1-ND, Voltage Rating=5V, Availability=Unavailable, Category="Audio Products", ComponentLink1Description=https://www.cui.com/product/resource/digikeypdf/cmt-8540s-smt.pdf?src-supplier=Digi-Key, ComponentLink1URL=https://www.cui.com/product/resource/digikeypdf/cmt-8540s-smt.pdf?src-supplier=Digi-Key, CUI_purchase_URL=https://www.cuidevices.com/product/audio/buzzers/audio-transducers/cmt-8540s-smt-tr?utm_source=snapeda.com&utm_medium=referral&utm_campaign=snapedaBOM, Lead Free="Lead Free", MF="CUI Devices", MP=CMT-8540S-SMT-TR, Price=None, Pricing 1="1=3.23000, 10=2.67000, 25=2.46400, 50=2.31400, 100=2.16990, 500=1.91520 (USD)", RoHS=Yes, Sensing Method=Magnetic, SnapEDA_Link=https://www.snapeda.com/parts/CMT-8540S-SMT-TR/CUI%20Devices/view-part/587791/?ref=snap, Stock 1=66147, Supplier 1=Digi-Key
MH1 MH2 MH3 MH4: "Mounting Holde", Manufacturer Part Number="UW MTHOLE"
Q1 Q2 Q3 Q4 Q5 Q6 Q7 Q8 Q9 Q10 Q11 Q12: library part CMP-2000-04929-2, "MOSFET N-CH 60V 115MA SOT23-3", Case/Package=SOT-23, Continuous Drain Current (ID)=115mA, Drain to Source Breakdown Voltage=70V, Drain to Source Resistance=7.5R, Drain to Source Voltage (Vdss)=60V, Gate to Source Voltage (Vgs)=20V, Input Capacitance=50pF, Max Operating Temperature=150°C, Max Power Dissipation=300mW, Min Operating Temperature=-55°C, Package Quantity=3000, Power Dissipation=540mW, Threshold Voltage=2.5V, Contact Plating=Tin, Current Rating=115mA, Dual Supply Voltage=60V, Element Configuration=Single, Fall Time=5.6ns, Height=1mm, Lead Free="Lead Free", Length=2.9mm, Mount="Surface Mount", Nominal Vgs=2.5V, Number of Channels=1, Number of Elements=1, Number of Pins=3, On-State Resistance=7.5R, Packaging="Tape and Reel", Radiation Hardening=No, Rds On Max=7.5R, REACH SVHC="No SVHC", Rise Time=3ns, Termination=SMD/SMT, Turn-Off Delay Time=11ns, Turn-On Delay Time=7ns, Voltage=60V, Voltage Rating (DC)=60V, Weight=0.000282oz, Width=1.3mm
Q13: library part CMP-2000-04929-2, "MOSFET N-CH 60V 115MA SOT23-3", Case/Package=SOT-23, Continuous Drain Current (ID)=115mA, Drain to Source Breakdown Voltage=70V, Drain to Source Resistance=7.5R, Drain to Source Voltage (Vdss)=60V, Gate to Source Voltage (Vgs)=20V, Input Capacitance=50pF, Manufacturer 1=Diodes, Max Operating Temperature=150°C, Max Power Dissipation=300mW, Min Operating Temperature=-55°C, Package Quantity=3000, Power Dissipation=540mW, Supplier Part Number 1=2N7002-FDICT-ND, Threshold Voltage=2.5V, Category=MOSFETs, ComponentLink1Description=https://datasheet.ciiva.com/15219/getdatasheetpartid-110059-15219667.pdf?src-supplier=Verical, ComponentLink1URL=https://datasheet.ciiva.com/15219/getdatasheetpartid-110059-15219667.pdf?src-supplier=Verical, ComponentLink2Description=https://datasheet.ciiva.com/3304/ds11303-3304385.pdf?src-supplier=Avnet, ComponentLink2URL=https://datasheet.ciiva.com/3304/ds11303-3304385.pdf?src-supplier=Avnet, ComponentLink3Description=https://datasheet.ciiva.com/1188/ds11303-1188363.pdf?src-supplier=Element14, ComponentLink3URL=https://datasheet.ciiva.com/1188/ds11303-1188363.pdf?src-supplier=Element14, ComponentLink4Description=https://datasheet.ciiva.com/22712/1915452-22712375.pdf?src-supplier=Element14, ComponentLink4URL=https://datasheet.ciiva.com/22712/1915452-22712375.pdf?src-supplier=Element14, ComponentLink5Description=https://datasheet.ciiva.com/49020/70437206-49020102.pdf?src-supplier=Allied+Electronics, ComponentLink5URL=https://datasheet.ciiva.com/49020/70437206-49020102.pdf?src-supplier=Allied+Electronics, Contact Plating=Tin, Current Rating=115mA, Drain-source On Resistance-Max=7.5R, Dual Supply Voltage=60V, Element Configuration=Single, Fall Time=5.6ns, Height=1mm, Lead Free="Lead Free", Length=2.9mm, Manufacturer Part Number 1=2N7002-7-F, Mount="Surface Mount", Nominal Vgs=2.5V, Number of Channels=1, Number of Elements=1, Number of Pins=3, On-State Resistance=7.5R, Packaging="Tape and Reel", Polarity=N-CHANNEL, Pricing 1="1=0.20000, 10=0.18600, 100=0.10140, 500=0.06236, 1000=0.04252 (USD)", Radiation Hardening=No, Rds On Max=7.5R, REACH SVHC="No SVHC", Reach SVHC Compliant=Yes, Rise Time=3ns, RoHS=Yes, RoHS Compliant=Yes, Series=-, Stock 1=1441532, Supplier 1=Digi-Key, Termination=SMD/SMT, Turn-Off Delay Time=11ns, Turn-On Delay Time=7ns, Voltage=60V, Voltage Rating (DC)=60V, Weight=0.000282oz, Width=1.3mm
R1 R2 R3 R4 R6 R7 R8 R9: library part CMP-2003-02098-2, "RES Thick Film, 330Ω, 1%, 0.25W, 100ppm/°C, 1206", Case Code (Imperial)=1206, Case Code (Metric)=3216, Max Operating Temperature=155°C, Max Power Dissipation=250mW, Min Operating Temperature=-55°C, Package Quantity=10, Resistance=330R, Temperature Coefficient=100ppm/°C, Tolerance=1%, Voltage Rating=200V, Case/Package=1206, Composition="Thick Film", Contact Plating=Tin, Depth=1.6mm, Features="Automotive AEC-Q200", Height=0.55mm, Lead Free="Lead Free", Length=3.2mm, Military Standard=Not, Mount="Surface Mount", Number of Terminations=2, Packaging="Tape and Reel", Power Rating=250mW, Radiation Hardening=No, Termination=SMD/SMT, Voltage Rating (DC)=200V, Weight=0.000353oz, Width=1.6mm
R5: library part CMP-1014-00623-2, "Chip Resistor, 10 KOhm, +/- 1%, 0.25 W, -55 to 155 degC, 1206 (3216 Metric), RoHS, Tape and Reel", Case Code (Imperial)=1206, Case Code (Metric)=3216, Manufacturer=Yageo, Max Operating Temperature=155degC, Min Operating Temperature=-55degC, Package Description="2-Pin Surface Mount Device, Body 3.1 x 1.6 mm", Package Quantity=5000, Package Reference=1206.0, Power Rating=250mW, Resistance=10KOhm, Temperature Coefficient=100ppm/degreesC, Tolerance=1%, Voltage Rating=200V, Case/Package=1206, Composition=ThickFilm, Datasheet URL=http://www.yageo.com/NewPortal/yageodocoutput?fileName=/pdf/R-Chip/PYu-RC_Group_51_RoHS_L_5.pdf, Datasheet Version="Rev. 5, 10/2016", Depth=1.6mm, Height=0.55mm, Lead Free=LeadFree, Length=3.1mm, Manufacturer URL=http://www.yageo.com/, Military Standard=Not, Packaging=TapeandReel, REACH SVHC=Unknown, RoHSCompliant=true, Termination=SMD/SMT, Width=1.6mm
R10 R11 R12 R13: library part CMP-2003-00856-1, Manufacturer=Panasonic, Part Number=ERJ8ENF5600V
R14 R15 R16: library part CMP-1014-00623-2, "Chip Resistor, 10 KOhm, +/- 1%, 0.25 W, -55 to 155 degC, 1206 (3216 Metric), RoHS, Tape and Reel", Case Code (Imperial)=1206, Case Code (Metric)=3216, Manufacturer=Yageo, Max Operating Temperature=155degC, Max Power Dissipation=250mW, Min Operating Temperature=-55degC, Package Description="2-Pin Surface Mount Device, Body 3.1 x 1.6 mm", Package Quantity=5000, Package Reference=1206.0, Resistance=10K, Resistance Tolerance=1%, Resistor Type="Thick Film", Supplier Part Number 1=311-10.0KFRCT-ND, Temperature Coefficient=100ppm/degreesC, Voltage Rating=200V, Case/Package=1206, Category="Chip SMD Resistors", ComponentLink1Description=https://datasheet.ciiva.com/46445/444357-46445703.pdf?src-supplier=Element14, ComponentLink1URL=https://datasheet.ciiva.com/46445/444357-46445703.pdf?src-supplier=Element14, ComponentLink2Description=https://datasheet.ciiva.com/7857/1692832-7857244.pdf?src-supplier=Element14, ComponentLink2URL=https://datasheet.ciiva.com/7857/1692832-7857244.pdf?src-supplier=Element14, ComponentLink3Description=https://datasheet.ciiva.com/7857/1692832-7857245.pdf?src-supplier=Element14, ComponentLink3URL=https://datasheet.ciiva.com/7857/1692832-7857245.pdf?src-supplier=Element14, Composition=ThickFilm, Construction=Rectangular, Datasheet URL=http://www.yageo.com/NewPortal/yageodocoutput?fileName=/pdf/R-Chip/PYu-RC_Group_51_RoHS_L_5.pdf, Datasheet Version="Rev. 5, 10/2016", Depth=1.6mm, Features="Moisture Resistant", Height=0.55mm, Lead Free=LeadFree, Length=3.1mm, Manufacturer Part Number=RC1206FR-0710KL, Manufacturer URL=http://www.yageo.com/, Military Standard=Not, Number of Terminations=2, Packaging=TapeandReel, Power Rating=250mW, Pricing 1="1=0.10000, 10=0.03700, 100=0.02040, 1000=0.01236, 2500=0.01036 (USD)", REACH SVHC=Unknown, RoHS=Yes, RoHS Compliant=Yes, RoHSCompliant=true, Series=RC, Size Code=1206, Stock 1=3827063, Supplier 1=Digi-Key, Supplier 2=Newark, Supplier Part Number 2=98K7621, Termination=SMD/SMT, Tolerance=1%, Width=1.6mm
SW1: library part CMP-2100-03586-2, "SWITCH TACTILE SPST-NO 0.05A 12V", Contact Current Rating=50mA, Contact Resistance=100mR, Insulation Resistance=100MR, Manufacturer=Omron, Max Operating Temperature=70°C, Max Voltage Rating (DC)=12V, Min Operating Temperature=-25°C, Operating Force=1.5N, Package Quantity=1, Ratings="Dust Proof", Supplier Part Number=SW1020CT-ND, Actuator Length=0.4mm, Actuator Type=Standard, Category="Tactile Switches", Contact Material=Silver, Current Rating=50mA, Depth=2.5mm, Electrical Life=200000Cycles, Height=1.2mm, Illumination Type=Non-Illuminated, Lead Free="Lead Free", Length=4mm, Manufacturer Part Number=B3U-1000P, Max Current Rating=50mA, Mechanical Life=200000Cycles, Mount="Surface Mount", Mounting Technology="Surface Mount", Orientation=Straight, Packaging="Tape and Reel", Pricing="1=1.02, 10=0.983, 25=0.9188, 100=0.7977, 250=0.72584, 500=0.67292, 1000=0.62377 (USD)", Reach SVHC Compliant=Unknown, RoHS=Yes, RoHS Compliant=Yes, Series=B3U, Stock=65266, Supplier=Digi-Key, Switch Function=Off-Mom, Switch Travel=0.15mm, Termination=SMD/SMT, Throw Configuration=SPST, Voltage Rating (DC)=12V, Weight=0.000776oz, Width=3mm
U1: "Bucky Badger Image", Manufacturer Part Number="UW Bucky"
U2: "ARM Microcontrollers - MCU PSoC4", Manufacturer 1=Infineon, Supplier Part Number 1=448-CY8C4045AZI-S413-ND, Category=Uncategorized, M Sadman Sakib="M Sadman Sakib", Manufacturer Part Number 1=CY8C4045AZI-S413, Pricing 1="1=3.87, 10=3.474, 25=3.284, 80=2.846, 250=2.70008, 500=2.42276, 1000=2.0433, 2500=1.946 (USD)", RoHS=Yes, RoHS Compliant=Yes, Stock 1=12044, Supplier 1=Digi-Key
U3: "Switch Tactile OFF (ON) SPST Round Button Gull Wing 0.05A 12VDC 1.57N SMD", Case/Package=SMD/SMT, Contact Rating @ Voltage="0.05A @ 12VDC", Current Rating=50mA, Illumination Type, Color=-, Manufacturer=E-Switch, Max Operating Temperature=70°C, Min Operating Temperature=-25°C, Operating Force=160gf, Operating Temperature="-25°C ~ 70°C", Package Quantity=1, Supplier Part Number=EG4906CT-ND, Voltage Rating (DC)=12V, Actuator Height off PCB, from Pins=4.30mm, Actuator Material=-, Actuator Orientation="Top Actuated", Actuator Type=Standard, Category=Switches, Circuit=SPST-NO, ComponentLink1Description=https://datasheet.ciiva.com/2900/n301101-2900856.pdf?src-supplier=Digi-Key, ComponentLink1URL=https://datasheet.ciiva.com/2900/n301101-2900856.pdf?src-supplier=Digi-Key, ComponentLink2Description=https://datasheet.ciiva.com/2900/n301101-2900858.pdf?src-supplier=Digi-Key, ComponentLink2URL=https://datasheet.ciiva.com/2900/n301101-2900858.pdf?src-supplier=Digi-Key, Contact Plating=Silver, Features=-, Illumination=Non-Illuminated, Illumination Type=Non-Illuminated, Illumination Voltage (Nominal)=-, Ingress Protection=-, Manufacturer 1=E-Switch, Manufacturer Part Number=TL3300DF160Q, Manufacturer Part Number 1=TL3300DF160Q, Mechanical Life="200,000 Cycles", Mount="Surface Mount", Mounting Type="Surface Mount", Outline="12.00mm x 12.00mm", Packaging="Cut Tape (CT)", Pricing 1="1=0.60000, 10=0.57800, 25=0.55680, 100=0.48180, 250=0.43896 (USD)", RoHS="RoHS Compliant", RoHS Compliant=Yes, Series=TL3300, Stock 1=57403, Supplier=Digi-Key, Supplier 1=Digi-Key, Supplier Part Number 1=EG4906CT-ND, Switch Function=Off-Mom, Switch Travel=0.35mm, Termination="Gull Wing", Termination Style="Gull Wing", Throw Configuration=SPST
U4: library part CMP-0395-00503-2, "Single Output LDO, 1 A, Fixed 3.3 V Output, 2 to 5.5 V Input, 4-pin SOT-223 (DCY), -40 to 125 degC, Green (RoHS & no Sb/Br)", Manufacturer="Texas Instruments", Accuracy(%)=2, Code_JEDEC=TO-261, ComponentLink1Description="Manufacturer URL", ComponentLink1URL=http://www.ti.com/, ComponentLink2Description=Datasheet, ComponentLink2URL=http://www.ti.com/general/docs/lit/getliterature.tsp?genericPartNumber=TLV1117LV33&fileType=pdf, ComponentLink3Description="Package Specification", ComponentLink3URL=http://www.ti.com/litv/pdf/mpds094a, DatasheetVersion=SBVS160A, Eco-Plan="Green (RoHS & no Sb/Br)", Fixed Output Options(V)=3.3, Iout(Max)(A)=1, Iq(Typ)(mA)=0.05, Mounting Technology="Surface Mount", PackageDescription="4-Pin Plastic Small Outline, Body 3.5 x 6.5 mm, Pitch 2.3 mm", PackageReference=DCY0004A, PackageVersion=4202506/B, PartNumber=TLV1117LV33DCYR, SubFamily="Single Channel LDO", Vdo(Typ)(mV)=1200, Vin(Max)(V)=5.5, Vin(Min)(V)=2, Vout Adj(Max)(V)=3.3, Vout Adj(Min)(V)=3.3
U5: library part CMP-0859-00043-4, "IC GATE AND 1CH 2-INP SOT23-5", Ambient Temperature Range High=+125°C, Ambient Temperature Range Low=-55°C, Case/Package=SOT-23, High Level Output Current=-8mA, Low Level Output Current=8mA, Manufacturer="Texas Instruments", Max Junction Temp=+150°C, Max Operating Temperature=125°C, Max Supply Voltage=5.5V, Min Supply Voltage=2V, Nominal Supply Current=1uA, Package=DBV0005A, Package Quantity=3000, Supplier Part Number=296-1091-1-ND, Temperature="-55°C to +125°C", Automotive=No, Category=IC, ComponentLink2Description=Datasheet, ComponentLink2URL=http://www.ti.com/lit/ds/symlink/sn74ahc1g08.pdf, Device Class L1="Integrated Circuits (ICs)", Device Class L2="Logic ICs", Device Class L3="Logic Gates", Digikey Description="IC GATE AND 1CH 2-INP SOT23-5", Height=1.45mm, Lead Free=Yes, Length=2.9mm, Logic Function="AND GATE", Logic Function Desc=Non-Inverting, Manufacturer Part Number=SN74AHC1G08DBVR, Max Output Current=8mA, Min Operating Temperature=-55°C, Mounting Technology="Surface Mount", Mouser Description="AND Gate 1-Element 2-IN CMOS 5-Pin SOT-23 AND Gate 1-Element 2-IN CMOS 5-Pin SOT-23 AND Gate 1-Element 2-IN CMOS 5-Pi...", Number of Bits=1, Number Of Circuits=1, Number of Elements=1, Number of Gates=1, Number of Input Lines=2, Number Of Inputs=2, Number of Output Lines=1, Number Of Outputs=1, Octopart=https://octopart.com/sn74ahc1g08dbvr-texas+instruments-464404, Output Current=8mA, Packaging="Tape and Reel", Pins=5, Pricing="1=0.34, 10=0.25, 25=0.2184, 100=0.1413, 250=0.117, 500=0.0936, 1000=0.07176 (USD)", Propagation Delay=5.8ns, Quiescent Current=1uA, Radiation Hardening=No, Reach SVHC Compliant=No, RoHS=TRUE, RoHS Compliant=Yes, Series=74AHC, Standoff Height=0mm, Stock=156425, Supplier=Digi-Key, Technology=CMOS, Temperature Range High=+125°C, Temperature Range Low=-55°C, Termination=SMD/SMT, Turn-On Delay Time=12.3ns, Weight=0.000557oz, Width=1.6mm

## Via types
v1: diameter 0.6, hole 0.3, Top Layer to Bottom Layer, 194 vias

## Nets (pads, with @x,y where several pads share a name; then routed paths per layer and width w, separated by ;. In a path a pad name is that pad's centre, name@x,y a point inside that pad or via, vN(x,y) a via of type N, cw(c..) or ccw(c..) an arc to the next point about the centre after c; other vN are vias at no path point)
3.3V: 3.3V.1 C1.2 C2.2 C3.2 C6.2 D1.1 J1.5 LS1.P R5.2 R15.2 R16.2 U2.21 U2.39 U2.40 U4.2 U4.4 U5.5 | length 5.6
  Top Layer w1: v1(85.8,26) 85.8,28.65 D1.1
  Bottom Layer w1: LS1.P 85.5,25.7 v1(85.8,26)
5.0V: 5V.1 C5.2 J2.3 J3.3 J4.1 J4.2 J4.3 J5.1 J5.2 J5.3 R1.1 R2.1 R3.1 R4.1 R6.1 R7.1 R8.1 R9.1 R10.1 R11.1 R12.1 R13.1 U4.3 | length 156.7
  Top Layer w0.3: J4.2 2.835,70.731 3.011,70.555 J4.1 J4.3 v1(23,73.095) ; v1(23,76.105) 23.081,76.105 23.266,75.92 J2.3 J3.3 76.185,77.105 v1(92,77.105) 92.2,76.905 J5.3 ; C5.2 24.5,18.2 25.1,18.8 25.752,18.8 25.952,19 v1(26,19) ; v1(24.875,21) U4.3 ; R4.1 v1(88.089,50) ; R6.1 87.81,40 87.919,39.891 v1(88,39.891) ; R3.1 86.569,60.043 v1(88,60.043) 88.021,60.021 91.918,60.021 v1(91.939,60) ; J5.1 J5.3 ; J5.2 97.165,77.129 96.989,76.953 94.673,76.953 J5.3
  Bottom Layer w0.3: v1(23,73.095) v1(23,76.105) ; v1(24.875,21) 25,20.875 25,20 v1(26,19) ; v1(88,39.891) 88.089,39.981 v1(88.089,50) 88.089,59.953 v1(88,60.043) ; v1(91.939,60) 92,60.061 v1(92,77.105)
BTN_IN: R5.1 U2.1 U3.3 U3.4 | length 31.1
  Top Layer w0.6: v1(46.35,45) 46.35,45.399 46.701,45.75 U2.1@47.1,45.75 ; v1(47.357,66.65) 50.094,66.65 51.525,65.219 R5.1
  Bottom Layer w0.6: v1(47.357,66.65) 47.5,66.507 U3.4 47.5,51.371 46.35,50.221 v1(46.35,45) 46.273,44.923 46.273,44.227 U3.3
BUZZER: Q13.1 R14.2 U2.17 | length 39.5
  Top Layer w0.3: U2.17@54.75,49.25 55.747,49.25 55.922,49.426 v1(57.169,49.426) ; v1(57.45,43) v1(74,43) ; v1(74,34.525) R14.2 77.562,34.525 78.1,33.987 78.963,33.987 Q13.1
  Bottom Layer w0.3: v1(57.169,49.426) 57.226,49.368 57.226,48.749 57.45,48.526 57.45,48.119 57.35,48.019 57.35,47.481 57.45,47.381 57.45,47.354 57.316,47.219 57.316,46.681 57.45,46.546 v1(57.45,43) ; v1(74,34.525) v1(74,43)
BUZZER_Q: D1.2 LS1.N Q13.3 | length 21.1
  Top Layer w0.5: Q13.3 85.85,33 D1.2 86.15,33 v1(92.5,33)
  Bottom Layer w0.5: LS1.N v1(92.5,33)
EN_G1: Q1.1 U2.43 | length 34.4
  Top Layer w0.3: U2.43 v1(51.911,49.75) ; v1(51.943,52.75) 52.899,52.75 54.167,54.018 54.675,54.018 v1(56,55.343) ; v1(52.7,70.84) 52.781,70.84 52.891,70.95 Q1.1 ; v1(52.75,67.46) 52.755,67.465 v1(56,67.465)
  Bottom Layer w0.3: v1(51.911,49.75) 51.927,49.766 51.927,52.734 v1(51.943,52.75) ; v1(52.7,70.84) 52.75,70.79 v1(52.75,67.46) ; v1(56,55.343) v1(56,67.465)
EN_G2: Q2.1 U2.44 | length 36.9
  Top Layer w0.3: v1(44.2,49.25) U2.44 ; v1(45,60.611) 47.893,60.611 47.952,60.553 60.15,60.553 v1(60.2,60.603) ; v1(61.541,65.971) 61.552,65.961 63.989,65.961 Q2.1
  Bottom Layer w0.3: v1(44.2,49.25) 44.2,59.811 v1(45,60.611) ; v1(60.2,60.603) 60.2,64.63 v1(61.541,65.971)
EN_G3: Q3.1 U2.45 | length 49.9
  Top Layer w0.3: v1(44.2,47.881) 44.257,47.938 44.257,48.347 44.66,48.75 U2.45 ; v1(44.598,40.4) v1(63.299,40.4) ; v1(63.25,56) 63.275,55.975 68.975,55.975 Q3.1
  Bottom Layer w0.3: v1(44.2,47.881) 44.2,47.799 44.598,47.401 v1(44.598,40.4) ; v1(63.25,56) 63.274,55.976 63.274,40.424 v1(63.299,40.4)
EN_G4: Q4.1 U2.46 | length 24.5
  Top Layer w0.3: U2.46 51.921,48.25 v1(52.171,48) ; v1(53.65,46.01) 53.68,45.98 68.97,45.98 Q4.1
  Bottom Layer w0.3: v1(52.171,48) 53.65,46.521 v1(53.65,46.01)
EN_R1: Q9.1 U2.28 | length 51
  Top Layer w0.3: v1(27.75,46.35) 27.831,46.35 28.1,46.081 28.7,46.081 28.75,46.131 28.75,46.2 Q9.1 ; v1(27.75,48) 42.374,48 v1(43.424,46.95) ; v1(43.298,59.703) 45.589,59.703 45.731,59.844 46.269,59.844 46.411,59.703 48.811,59.703 48.952,59.844 v1(51.434,59.844) ; U2.28 51.25,55.057 51.636,55.443 51.911,55.443 52.169,55.7 52.719,55.7 52.911,55.507 53.593,55.507 v1(53.65,55.45) ; v1(51.426,58.544) 52.234,58.544 52.326,58.635 53.625,58.635 v1(53.65,58.66)
  Bottom Layer w0.3: v1(27.75,46.35) v1(27.75,48) ; v1(43.298,59.703) 43.298,57.286 43.65,56.933 43.65,52.586 43.55,52.486 43.55,47.288 43.481,47.22 43.481,47.007 v1(43.424,46.95) ; v1(51.426,58.544) 51.43,58.548 51.43,59.84 v1(51.434,59.844) ; v1(53.65,55.45) v1(53.65,58.66)
EN_R2: Q10.1 U2.29 | length 32.4
  Top Layer w0.3: Q10.1 29.05,55.95 30.091,56.991 v1(36,56.991) ; v1(36.6,60.271) 37.531,61.203 44.672,61.203 44.731,61.261 45.269,61.261 45.328,61.203 v1(50.494,61.203) ; U2.29 50.75,55.769 50.834,55.853 v1(50.834,55.934)
  Bottom Layer w0.3: v1(36,56.991) 36.6,57.591 v1(36.6,60.271) ; v1(50.494,61.203) 50.494,58.622 50.776,58.341 50.776,58.275 50.834,58.216 v1(50.834,55.934)
EN_R3: Q11.1 U2.30 | length 33.8
  Top Layer w0.3: v1(32.369,67.125) v1(38,67.125) ; v1(32.491,66) 32.516,65.975 33.975,65.975 Q11.1 ; v1(38.5,63) 43.424,63 43.668,62.756 48.813,62.756 48.829,62.739 49.097,62.739 49.098,62.738 v1(50.536,62.738) ; v1(50,56.871) 50,55.849 50.25,55.599 U2.30
  Bottom Layer w0.3: v1(32.369,67.125) 32.369,66.122 v1(32.491,66) ; v1(38,67.125) 38,67.091 38.5,66.591 v1(38.5,63) ; v1(50,56.871) 49.994,56.877 49.994,57.725 50,57.731 50,58.269 49.994,58.275 49.994,59.879 49.844,60.029 49.844,62.046 v1(50.536,62.738)
EN_R4: Q12.1 U2.31 | length 24.1
  Top Layer w0.3: v1(42.881,70.84) 42.962,70.84 43.072,70.95 Q12.1 ; v1(43,64.05) 43.081,64.05 43.743,63.388 v1(49.5,63.388) ; v1(49.35,58) 49.35,56.602 49.4,56.552 49.4,55.742 49.75,55.392 U2.31
  Bottom Layer w0.3: v1(42.881,70.84) 43,70.721 v1(43,64.05) ; v1(49.35,58) 49.344,58.006 49.344,62.421 49.5,62.577 v1(49.5,63.388)
EN_Y1: Q5.1 U2.33 | length 48.9
  Top Layer w0.3: v1(48.684,62.106) 48.73,62.152 49.667,62.152 49.731,62.088 54.521,62.088 55.406,61.203 59.881,61.203 59.931,61.253 60.469,61.253 60.519,61.203 v1(62,61.203) ; U2.33 v1(48.75,55.934) ; v1(62,36) 62.55,36 62.6,35.95 Q5.1
  Bottom Layer w0.3: v1(48.684,62.106) 48.684,58.386 48.75,58.319 48.7,58.269 48.7,57.731 48.75,57.681 v1(48.75,55.934) ; v1(62,36) v1(62,61.203)
EN_Y2: Q6.1 U2.34 | length 28.2